# Altium PCB ИУ4.11.03.03.20.63.13.PcbDoc
Units mm, origin at the board's own origin, x right, y up, seen from the top; angles counter-clockwise.
Board outline 30 x 50 mm, 2 copper layers (Top Layer, Bottom Layer); 31 components, 22 nets, 135 pads, 19 vias.
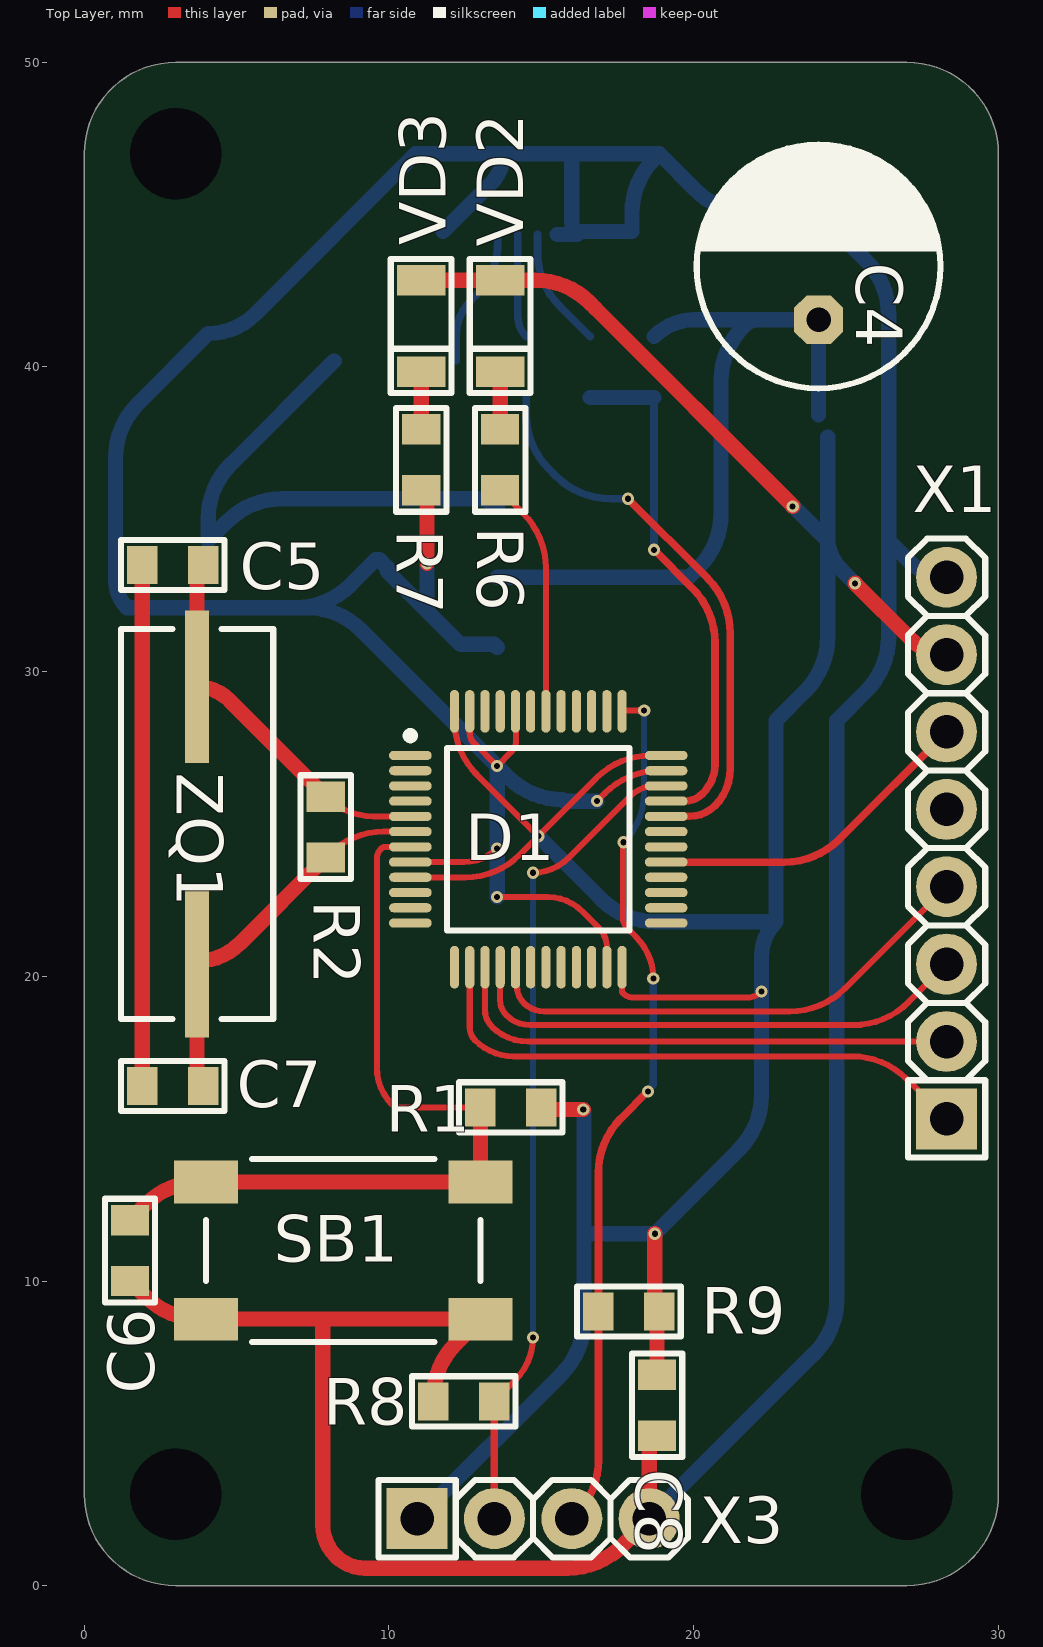
[diagram p0: Top Layer view]
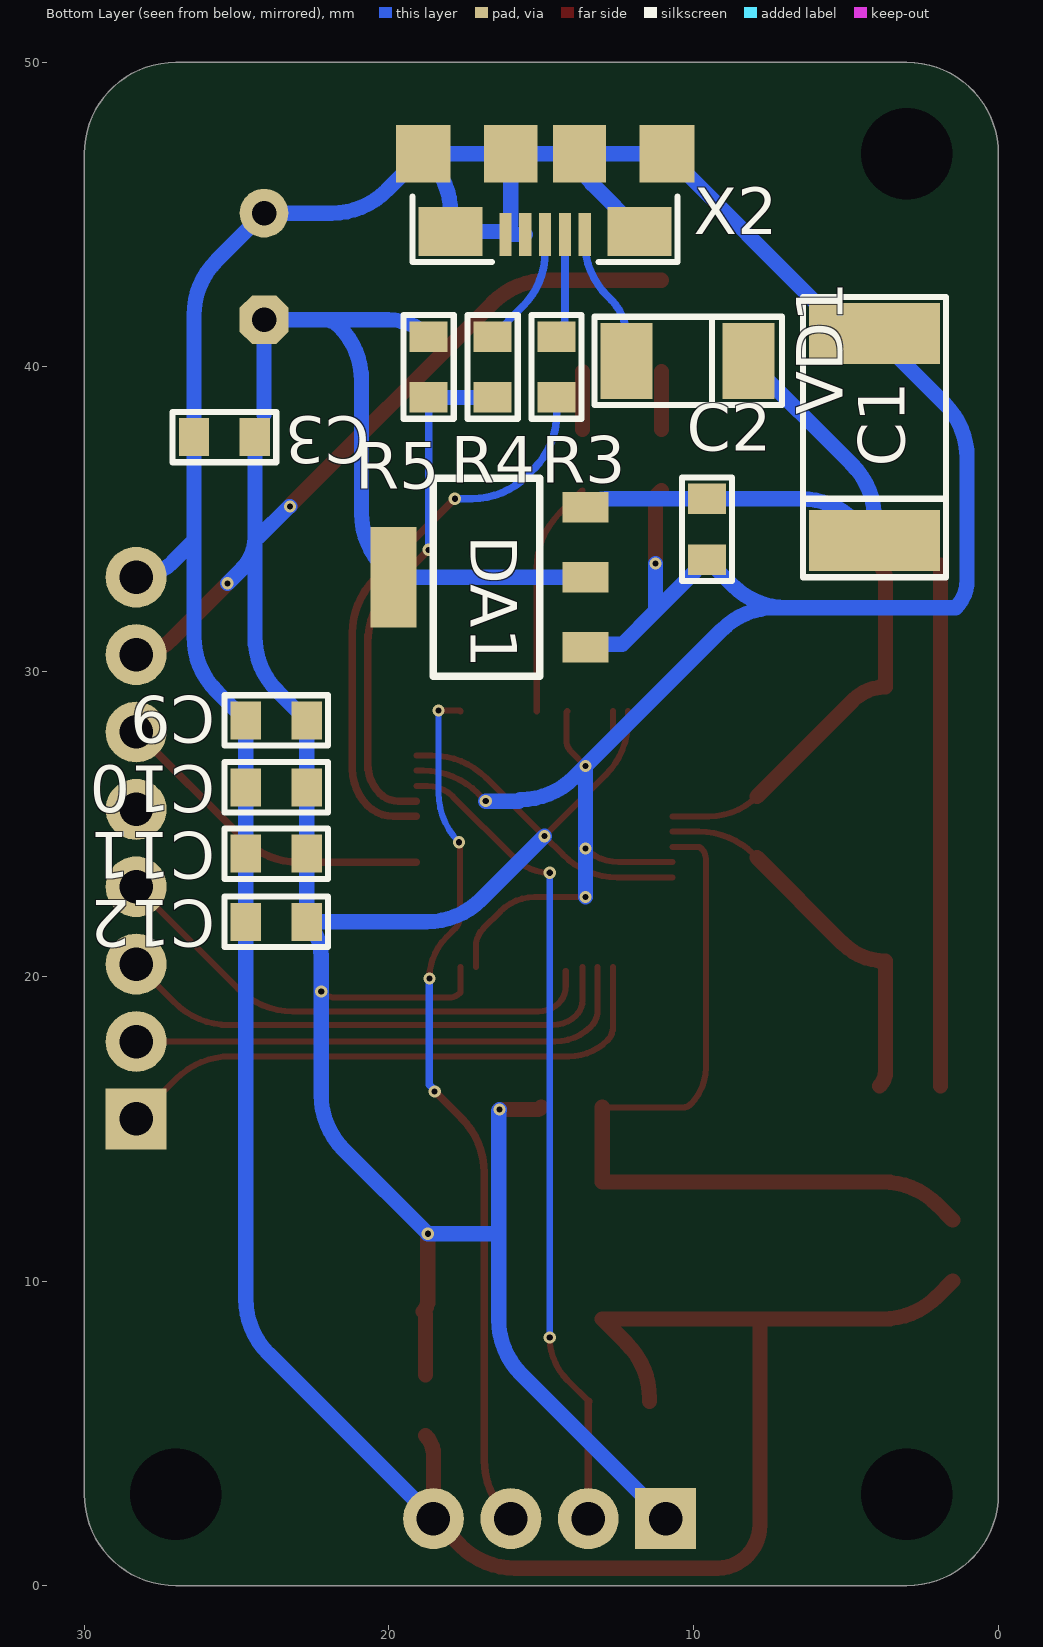
[diagram p1: Bottom Layer view, seen from below]
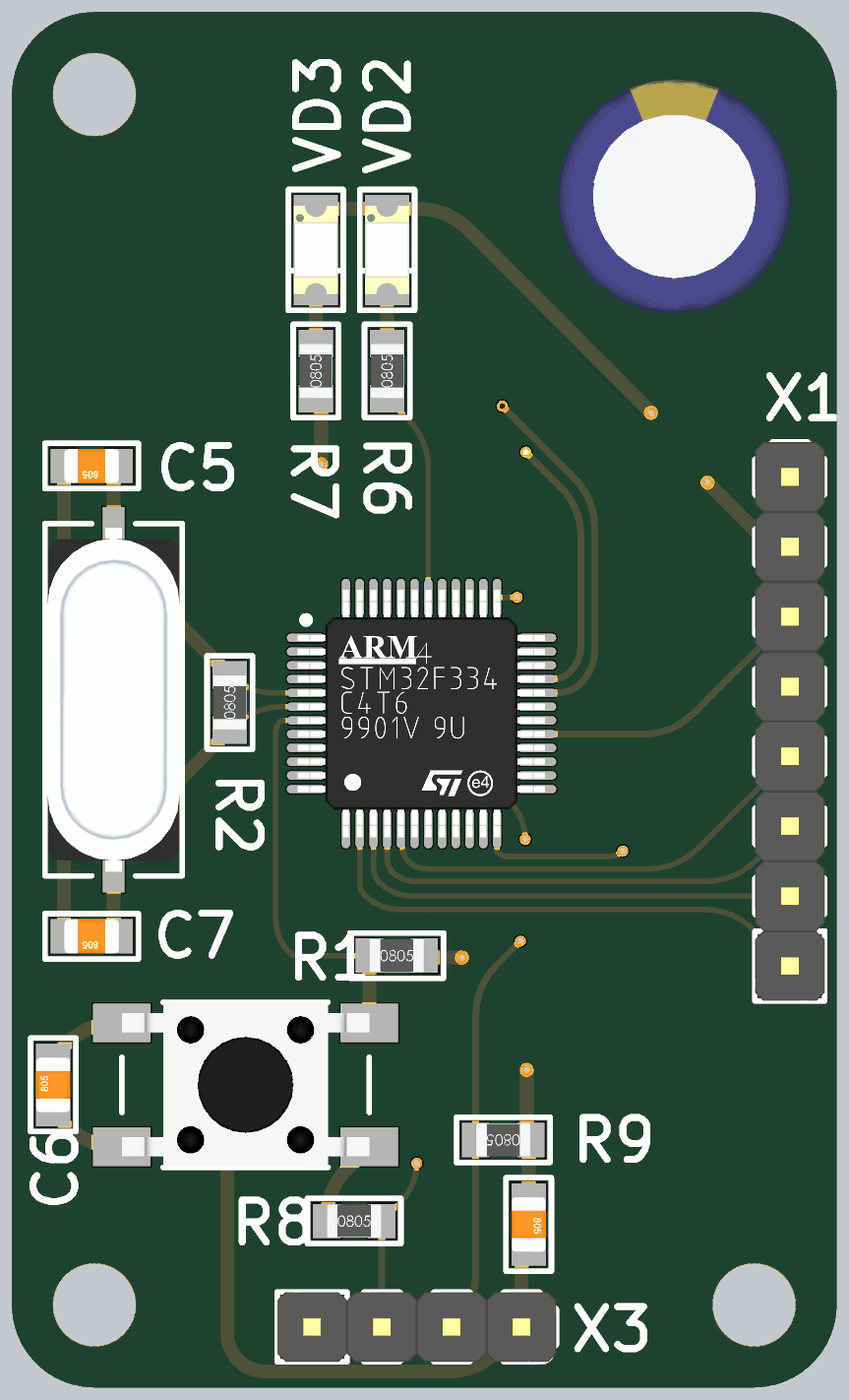
[diagram p2: 3D render of the assembled board from above, using the file's embedded part models]
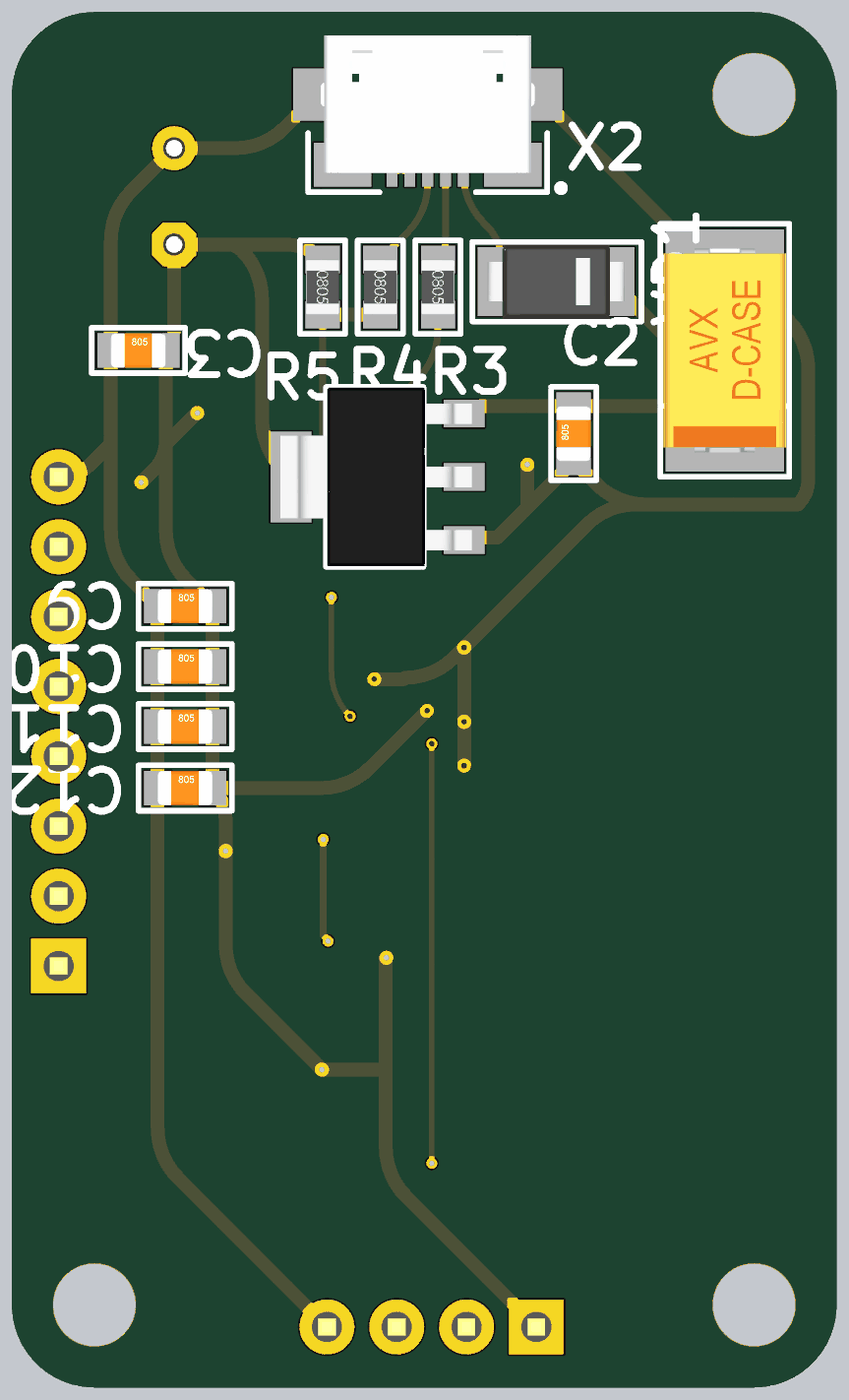
[diagram p3: 3D render of the assembled board from below, using the file's embedded part models]

## Layer stack, top to bottom
Top Solder: solder mask 0.0102, Solder Resist, Dk 3.5
Top Layer: signal copper 0.0356
Dielectric 1: dielectric 0.32, FR-4, Dk 4.8
Bottom Layer: signal copper 0.0356
Bottom Solder: solder mask 0.0102, Solder Resist, Dk 3.5

## Board outline
3,0 cw(c3,3) 0,3 0,47 cw(c3,47) 3,50 27,50 cw(c27,47) 30,47 30,3 cw(c27,3) 27,0

## Design rules (kind name [scope] priority, off if disabled: settings)
Clearance [All] p1: gap=0.1 ignorepadtopadclearanceinfootprint=FALSE
DiffPairsRouting [All] p1: maxlimit=0.3 minlimit=0.2 mostfreqgap=0.25 toplayer_minwidth=0.2 toplayer_maxwidth=0.4 toplayer_prefwidth=0.3 bottomlayer_minwidth=0.2 bottomlayer_maxwidth=0.4 bottomlayer_prefwidth=0.3 maxuncoupledlength=12.7
PolygonConnect [All] p1: connectstyle=Relief reliefconductorwidth=0.254 reliefentries=4 polygonreliefangle="90 Angle" airgapwidth=0.254
RoutingCorners [All] p1: cornerstyle=Round minsetback=0.5 maxsetback=0.3
RoutingVias [All] p1: holewidth=0.2 width=0.4 viastyle="Through Hole" minholewidth=0.2 minwidth=0.4 maxholewidth=1 maxwidth=1
SolderMaskExpansion [All] p1: expansion=0.06 istentingtop=FALSE
Width [All] p1: maxlimit=0.5 minlimit=0.2 preferedwidth=0.25 minimp=50.000000 maximp=50.000000 favimp=50.000000
28 further rules are at their usual default settings.

## Components (designator, comment, footprint, x,y, rotation, side; value= is the part's Value field where it differs from the comment)
C1 "Tantalum capacitor, 100 мкФ, 16 В, ±20%, 900mOhm, case D (7343), -55...+125°C" "CAP: TANTAL-D" 4.065,37.7 r90 bottom value="100 мкФ"
C2 "Ceramic capacitor, 100 нФ, X7R, ±10%, 50 В, 0805, -55...+125°C" "CAP: 0805" 9.564,34.675 r90 bottom value="100 нФ"
C3 "Ceramic capacitor, 100 нФ, X7R, ±10%, 50 В, 0805, -55...+125°C" "CAP: 0805" 25.4,37.7 r180 bottom value="100 нФ"
C4 "Aluminium capacitor, 330 мкФ, 16 В, ±20%, 54mOhm, 14x10x5 mm, -55...+105°C" "CAP: D8C3.5H12" 24.1,43.3 r90 top value="330 мкФ"
C5 "Ceramic capacitor, 20 пФ, X7R, ±10%, 50 В, 0805, -55...+125°C" "CAP: 0805" 2.9,33.5 r180 top value="20 пФ"
C6 "Ceramic capacitor, 1 мкФ, X7R, ±10%, 50 В, 0805, -55...+125°C" "CAP: 0805" 1.5,11 r90 top value="1 мкФ"
C7 "Ceramic capacitor, 20 пФ, X7R, ±10%, 50 В, 0805, -55...+125°C" "CAP: 0805" 2.9,16.4 r180 top value="20 пФ"
C8 "Ceramic capacitor, 100 нФ, X7R, ±10%, 50 В, 0805, -55...+125°C" "CAP: 0805" 18.8,5.925 r270 top value="100 нФ"
C9 "Ceramic capacitor, 100 нФ, X7R, ±10%, 50 В, 0805, -55...+125°C" "CAP: 0805" 23.7,28.4 r180 bottom value="100 нФ"
C10 "Ceramic capacitor, 100 нФ, X7R, ±10%, 50 В, 0805, -55...+125°C" "CAP: 0805" 23.7,26.205 r180 bottom value="100 нФ"
C11 "Ceramic capacitor, 100 нФ, X7R, ±10%, 50 В, 0805, -55...+125°C" "CAP: 0805" 23.7,24.025 r180 bottom value="100 нФ"
C12 "Ceramic capacitor, 100 нФ, X7R, ±10%, 50 В, 0805, -55...+125°C" "CAP: 0805" 23.7,21.789 r180 bottom value="100 нФ"
D1 "IC microcontroller, 32-Bit, Cortex-M3, 72MHz, 64KB, 20KB, 2...3.6V, -40...+85°C, 48-LQFP" 48-LQFP 14.9,24.5 r0 top
DA1 "LM1117-Series" SOT-223 16.8,33.1 r90 bottom value=LM1117MPX-3.3
R1 "Resistor film, 10 кОм, ±1%, 0805, 0.125W, -55...+125°C" "RES: 0805" 14,15.7 r0 top value="10 кОм"
R2 "Resistor film, 1 МОм, ±1%, 0805, 0.125W, -55...+125°C" "RES: 0805" 7.925,24.9 r90 top value="1 МОм"
R3 "Resistor film, 20 Ом, ±1%, 0805, 0.125W, -55...+125°C" "RES: 0805" 14.5,40 r270 bottom value="20 Ом"
R4 "Resistor film, 20 Ом, ±1%, 0805, 0.125W, -55...+125°C" "RES: 0805" 16.6,40 r270 bottom value="20 Ом"
R5 "Resistor film, 10 кОм, ±1%, 0805, 0.125W, -55...+125°C" "RES: 0805" 18.7,40 r270 bottom value="10 кОм"
R6 "Resistor film, 510 Ом, ±1%, 0805, 0.125W, -55...+125°C" "RES: 0805" 13.65,36.95 r90 top value="510 Ом"
R7 "Resistor film, 510 Ом, ±1%, 0805, 0.125W, -55...+125°C" "RES: 0805" 11.057,36.95 r90 top value="510 Ом"
R8 "Resistor film, 10 кОм, ±1%, 0805, 0.125W, -55...+125°C" "RES: 0805" 12.45,6.05 r0 top value="10 кОм"
R9 "Resistor film, 10 кОм, ±1%, 0805, 0.125W, -55...+125°C" "RES: 0805" 17.875,9 r180 top value="10 кОм"
SB1 "Tactile button, 6x6mm" "BUT: 6x6 SMD" 8.5,11 r180 top
VD1 "Schottky diode, 80V, 500mA, 1V, 15pF, SOD-123, -55...+150°C" "DIODE: SMA" 10.2,40.2 r180 bottom
VD2 "LED, Green, *, *, *, -55...+150°C" "LED: 1206R" 13.65,41.35 r270 top
VD3 "LED, Green, *, *, *, -55...+150°C" "LED: 1206R" 11.057,41.35 r270 top
X1 "Connector, 8pin, 2.54mm, 500VAC, 3A" "CON: PLS-8" 28.3,24.21 r90 top
X2 "USB micro B" "CON: USB micro-A (ZX62-B-5PA)" 14.875,44.35 r0 bottom
X3 "Connector, 4pin, 2.54mm, 500VAC, 3A" "CON: PLS-4" 14.73,2.2 r0 top
ZQ1 "Crystal" HC-49SM 3.7,25 r90 top value=HC49S-8.000MHZ-20pF

## Footprints (in the part's own frame and the unit in brackets; to place one, negate y for a bottom-side part, rotate by r counter-clockwise, add the part's x,y. Pads: shape width x height; smd on the part's side, far side on the other; paste and mask are expansions set on the pad)
48-LQFP [mm] "QFP, 48-Leads, Body 7x7mm, Pitch 0.5mm, IPC Medium Density"
  oval 1.4x0.3 smd: 1(-4.2,2.75) 2(-4.2,2.25) 3(-4.2,1.75) 4(-4.2,1.25) 5(-4.2,0.75) 6(-4.2,0.25) 7(-4.2,-0.25) 8(-4.2,-0.75) 9(-4.2,-1.25) 10(-4.2,-1.75) 11(-4.2,-2.25) 12(-4.2,-2.75) 25(4.2,-2.75) 26(4.2,-2.25) 27(4.2,-1.75) 28(4.2,-1.25) 29(4.2,-0.75) 30(4.2,-0.25) 31(4.2,0.25) 32(4.2,0.75) 33(4.2,1.25) 34(4.2,1.75) 35(4.2,2.25) 36(4.2,2.75)
  oval 0.3x1.4 smd: 13(-2.75,-4.2) 14(-2.25,-4.2) 15(-1.75,-4.2) 16(-1.25,-4.2) 17(-0.75,-4.2) 18(-0.25,-4.2) 19(0.25,-4.2) 20(0.75,-4.2) 21(1.25,-4.2) 22(1.75,-4.2) 23(2.25,-4.2) 24(2.75,-4.2) 37(2.75,4.2) 38(2.25,4.2) 39(1.75,4.2) 40(1.25,4.2) 41(0.75,4.2) 42(0.25,4.2) 43(-0.25,4.2) 44(-0.75,4.2) 45(-1.25,4.2) 46(-1.75,4.2) 47(-2.25,4.2) 48(-2.75,4.2)
  round 0.5 on Mech1: ""(-4,4)
  silkscreen extent -4.32,-3 3,3.52, body extent -4.5,-4.5 4.5,4.5, height 1.6
"BUT: 6x6 SMD" [mm] "Leaded Tactile Button 6x6"
  rect 2.1x1.4 smd: 1(-4.5,2.25) 1(4.5,2.25) 2(-4.5,-2.25) 2(4.5,-2.25)
  silkscreen extent -4.5,-3 4.5,3, body extent -4.5,-3 4.5,3, height 4.3
"CAP: 0805" [mm]
  rect 1x1.25 smd: 1(-1,0) 2(1,0)
  silkscreen extent -1.7,-0.83 1.7,0.82, body extent -1,-0.62 1,0.63, height 0.78
"CAP: D8C3.5H12" [mm]
  oct 1.6x1.6 hole 0.8: 1(-1.75,0)
  round 1.6 hole 0.8: 2(1.75,0)
  silkscreen extent -4,-4 4,4, body extent -4.25,-4.25 4.25,4.25, height 13
"CAP: TANTAL-D" [mm]
  rect 2x4.3 smd: 1(-3.4,0) 2(3.4,0)
  silkscreen extent -4.6,-2.35 4.6,2.35, body extent -3.7,-2.22 3.7,2.23, height 3.01
"CON: PLS-4" [mm] "PLS-40 4 pin header"
  rect 2x2 hole 1.1: 1(-3.81,0)
  round 2 hole 1.1: 2(-1.27,0) 3(1.27,0) 4(3.81,0)
  silkscreen extent -5.08,-1.27 5.08,1.27, body extent -5.08,-1.27 5.08,1.27, height 8.54
"CON: PLS-8" [mm] "PLS-40 8 pin header"
  rect 2x2 hole 1.1: 1(-8.89,0)
  round 2 hole 1.1: 2(-6.35,0) 3(-3.81,0) 4(-1.27,0) 5(1.27,0) 6(3.81,0) 7(6.35,0) 8(8.89,0)
  silkscreen extent -10.16,-1.27 10.16,1.27, body extent -10.16,-1.27 10.16,1.27, height 8.54
"CON: USB micro-A (ZX62-B-5PA)" [mm]
  rect 1.8x1.9 smd: 0(-4,-2.65) 0(4,-2.65)
  rect 2.1x1.6 smd: 0(-3.1,-0.1) 0(3.1,-0.1)
  rect 1.75x1.9 smd: 0(-1.125,-2.65) 0(1.125,-2.65)
  rect 0.4x1.4 smd: 1(-1.3,0) 2(-0.65,0) 3(0,0) 4(0.65,0) 5(1.3,0)
  round 0.5 on Bottom Overlay: ""(-4.85,0.75)
  silkscreen extent -4.35,-1.25 4.35,0.9, body extent -3.9,-4.8 3.9,0.2, height 2.68
"DIODE: SMA" [mm]
  rect 1.7x2.5 smd: 1(-2,0) 2(2,0)
  round 0.5 on Mech1: ""(2,0.9)
  silkscreen extent -3.05,-1.45 3.1,1.45, body extent -2.5,-1.35 2.5,1.35, height 2.28
HC-49SM [mm] "HC49 Surface Mount Footprint"
  rect 5x0.8 smd: 1(-4.5,0) 3(4.5,0)
  silkscreen extent -6.4,-2.5 6.4,2.5, body extent -6.25,-2.4 6.25,2.4, height 4.02
"LED: 1206R" [mm]
  rect 1x1.6 smd: 1(-1.5,0) 2(1.5,0)
  silkscreen extent -2.2,-1 2.2,1, body extent -1.6,-0.8 1.6,0.8, height 1.1
"RES: 0805" [mm]
  rect 1x1.25 smd: 1(-1,0) 2(1,0)
  silkscreen extent -1.7,-0.82 1.7,0.83, body extent -1,-0.6 1,0.6, height 0.44
SOT-223 [mm]
  rect 1x1.5 smd: 1(-2.3,-3.25) 2(0,-3.25) 3(2.3,-3.25)
  rect 3.3x1.5 smd: 2(0,3.05)
  silkscreen extent -3.25,-1.75 3.25,1.75, body extent -3.25,-3.53 3.25,3.43, height 1.65

## Part data
C1: library part Tantal_D, Manufacturer=AVX, Package="case D (7343)", PartNumber=TAJD476M035RNJV, Temperature=-55...+125°C, Tolerance=±20%, TypeCapacitor="Tantalum capacitor", TypeDielectric=X7R, Voltage="16 В", HelpURL=https://www.digikey.com/product-detail/en/avx-corporation/TAJD476M035RNJV/478-12122-1-ND/8605695, Impedance=900mOhm, ValueManufacturerPartNumber="Tantalum capacitor, 100 мкФ, 16 В, ±20%, 900mOhm, case D (7343), -55...+125°C"
C2 C3 C5 C6 C7 C8 C9 C10 C11 C12: library part Ceramic_0805, Manufacturer=Yageo, Package=0805, PartNumber=CC0805KRX7R7BB104, Temperature=-55...+125°C, Tolerance=±10%, TypeCapacitor="Ceramic capacitor", TypeDielectric=X7R, Voltage="50 В", HelpURL=https://www.digikey.com/product-detail/en/yageo/CC0805KRX7R7BB104/311-1142-1-ND/303052
  C2 C3 C8 C9 C10 C11 C12: ValueManufacturerPartNumber="Ceramic capacitor, 100 нФ, X7R, ±10%, 50 В, 0805, -55...+125°C"
  C5 C7: ValueManufacturerPartNumber="Ceramic capacitor, 20 пФ, X7R, ±10%, 50 В, 0805, -55...+125°C"
  C6: ValueManufacturerPartNumber="Ceramic capacitor, 1 мкФ, X7R, ±10%, 50 В, 0805, -55...+125°C"
C4: library part Aluminium, Manufacturer=Wurth, Package="14x10x5 mm", PartNumber=860080475013, Temperature=-55...+105°C, Tolerance=±20%, TypeCapacitor="Aluminium capacitor", Voltage="16 В", HelpURL=https://www.digikey.com/product-detail/en/wurth-electronics-inc/860080475013/732-9029-1-ND/5728972, Impedance=54mOhm, ValueManufacturerPartNumber="Aluminium capacitor, 330 мкФ, 16 В, ±20%, 54mOhm, 14x10x5 mm, -55...+105°C"
D1: library part STM32F103C8T6, "Cortex-M3", Manufacturer=STMicroelectronics, Package=48-LQFP, Temperature=-40...+85°C, ComponentType="IC microcontroller", CoreProcessor=Cortex-M3, CoreSize=32-Bit, HelpURL=https://www.digikey.com/product-detail/en/stmicroelectronics/STM32F103C8T6TR/497-17666-1-ND/7804402, MemoryRAM=20KB, MemoryROM=64KB, PartNumber=STM32F103C8T6, Speed=72MHz, Supply=2...3.6V, ValueManufacturerPartNumber="IC microcontroller, 32-Bit, Cortex-M3, 72MHz, 64KB, 20KB, 2...3.6V, -40...+85°C, 48-LQFP"
DA1: library part LM1117MPX-3.3, Input Voltage=+8.5…20V, Output Current=800mA, Output Voltage=+3.3V, ID=9, Part Number=LM1117MPX-3.3, Published=13.08.2015, Publisher="Andrew Danich", Type=Микросхема
R1 R2 R3 R4 R5 R6 R7 R8 R9: library part Resistor_0805, Manufacturer=Yageo, Package=0805, PartNumber=RC0805JR-07100RL, Power=0.125W, Temperature=-55...+125°C, Tolerance=±1%, TypeResistor="Resistor film", HelpURL=https://www.digikey.com/product-detail/en/yageo/RC0805JR-07100RL/311-100ARCT-ND/731185
  R1 R5 R8 R9: ValueManufacturerPartNumber="Resistor film, 10 кОм, ±1%, 0805, 0.125W, -55...+125°C"
  R2: ValueManufacturerPartNumber="Resistor film, 1 МОм, ±1%, 0805, 0.125W, -55...+125°C"
  R3 R4: ValueManufacturerPartNumber="Resistor film, 20 Ом, ±1%, 0805, 0.125W, -55...+125°C"
  R6 R7: ValueManufacturerPartNumber="Resistor film, 510 Ом, ±1%, 0805, 0.125W, -55...+125°C"
SB1: library part Button_tactile, Manufacturer="TE Connectivity", Package=6x6mm, PartNumber=FSM2JSMAATR, CommentText="\"Кнопка\"", HelpURL=https://www.digikey.com/product-detail/en/te-connectivity-alcoswitch-switches/FSM2JSMAATR/450-1792-1-ND/3503931, TypeButton="Tactile button", ValueManufacturerPartNumber="Tactile button, 6x6mm"
VD1: library part Schottky_single, Current=500mA, Manufacturer="Diodes Incorporated", Package=SOD-123, PartNumber=VS-10MQ100-M3/5AT, Temperature=-55...+150°C, Voltage=80V, VoltageDrop=1V, HelpURL=https://www.digikey.com/product-detail/en/diodes-incorporated/MBR0580S1-7/MBR0580S1-7DICT-ND/5080371, RecoveryTime=15pF, TypeDiode="Schottky diode", ValueManufacturerPartNumber="Schottky diode, 80V, 500mA, 1V, 15pF, SOD-123, -55...+150°C"
VD2 VD3: library part LED_single, Color=GREEN, ColorParameter=Green, Temperature=-55...+150°C, TypeDiode=LED, ValueManufacturerPartNumber="LED, Green, *, *, *, -55...+150°C"
X1: library part PLS-8, CurrentMax=3A, Manufacturer=Connfly, VoltageMax=500VAC, CommentText="\"RC522\"", HelpURL=https://www.chipdip.ru/product/pls-8-ds1021-1-8sf112, Multichannel=8pin, PartNumber=PLS-8, Pitch=2.54mm, TypeConnector=Connector, ValueManufacturerPartNumber="Connector, 8pin, 2.54mm, 500VAC, 3A"
X2: library part Connector_USB_micro_B, Manufacturer="Hirose Electric", PartNumber=ZX62-B-5PA, CommentText="\"USB\"", HelpURL=https://www.digikey.com/product-detail/en/hirose-electric-co-ltd/ZX62-B-5PA/H11579CT-ND/1851090, TypeConnector="USB micro B", ValueManufacturerPartNumber="USB micro B"
X3: library part PLS-4, CurrentMax=3A, Manufacturer=Connfly, VoltageMax=500VAC, CommentText="\"SWD\"", HelpURL=https://www.chipdip.ru/product/pls-4, Multichannel=4pin, PartNumber=PLS-4, Pitch=2.54mm, TypeConnector=Connector, ValueManufacturerPartNumber="Connector, 4pin, 2.54mm, 500VAC, 3A"
ZQ1: library part HC49SM-8.000MHz-20pF, Load Capacitance=20pF, Output Frequency=8MHz, Temperature Coefficient=±50ppm, Application Category=1, ID=17, Part Number=HC49SM-8.000MHz-20pF, Published=08.03.2013, Publisher="Andrew Danich", Type=Резонатор

## Free pads (board coordinates)
  round 0 hole 3: 2(3,3) 2(3,47) 2(27,3)

## Via types
v1: diameter 0.4, hole 0.2, Top Layer to Bottom Layer, 19 vias

## Nets (pads, with @x,y where several pads share a name; then routed paths per layer and width w, separated by ;. In a path a pad name is that pad's centre, name@x,y a point inside that pad or via, vN(x,y) a via of type N, cw(c..) or ccw(c..) an arc to the next point about the centre after c; other vN are vias at no path point)
+3.3: C3.2 C4.1 C8.1 C9.2 C10.2 C11.2 C12.2 D1.9 D1.24 D1.36 D1.48 DA1.2 R1.2 R5.1 R9.1 VD2.1 VD3.1 X1.7 X3.1 | length 210.4
  Top Layer w0.2: D1.9 12.508,23.25 ; D1.48 D1.48@12.15,28.392 ; D1.24 17.65,19.51 ccw(c17.735,19.51) 17.675,19.45 ccw(c18.037,19.812) 18.037,19.3 21.742,19.3 ccw(c21.742,19.983) v1(22.225,19.5) ; D1.36 D1.36@18.592,27.25 ; D1.48@12.15,28.392 ccw(c14.665,28.392) 12.887,26.613 ; D1.48@12.15,28.392 ccw(c14.665,28.392) 12.887,26.613 ; D1.48@12.15,28.392 ccw(c14.665,28.392) 12.887,26.613 ; D1.48@12.15,28.392 ccw(c14.665,28.392) 12.887,26.613 ; 12.508,23.25 ccw(c12.508,25.765) 14.286,23.987 ; 12.508,23.25 ccw(c12.508,25.765) 14.286,23.987 ; 12.508,23.25 ccw(c12.508,25.765) 14.286,23.987 ; 12.508,23.25 ccw(c12.508,25.765) 14.286,23.987 ; 12.887,26.613 v1(14.9,24.6) ; 14.286,23.986 v1(14.9,24.6) ; v1(14.9,24.6) 16.813,26.513 ; 16.813,26.513 cw(c18.592,24.735) D1.36@18.592,27.25 ; 16.813,26.513 cw(c18.592,24.735) D1.36@18.592,27.25 ; 16.813,26.513 cw(c18.592,24.735) D1.36@18.592,27.25 ; 16.813,26.513 cw(c18.592,24.735) D1.36@18.592,27.25
  Top Layer w0.5: VD3.1 VD2.1 14.798,42.85 cw(c14.798,40.31) 16.594,42.106 16.771,41.929 23.25,35.45 v1(23.25,35.425) ; R1.2 ccw(c15.181,15.881) 15.181,15.625 v1(16.375,15.625) ; v1(18.725,11.55) 18.725,9.362 ccw(c19.237,9.362) R9.1 ccw(c19.056,8.819) 18.8,8.819 C8.1 ; v1(25.3,32.9) 27.173,31.027 ccw(c28.3,32.153) X1.7
  Bottom Layer w0.5: X3.1 15.656,6.936 ccw(c13.86,8.732) 16.4,8.732 16.4,11.6 ; DA1.2@13.55,33.1 19.85,33.1 DA1.2@20.156,33.406 ; v1(14.9,24.6) 16.967,22.533 ccw(c18.763,24.329) 18.763,21.789 C12.2 ; v1(16.375,15.625) cw(c16.315,15.565) 16.4,15.565 16.4,11.6 ; v1(23.25,35.425) 23.275,35.425 24.3,34.4 24.4,34.4 ; 24.1,38.424 C4.1 20.028,41.55 ; C3.2 24.4,34.4 ; v1(25.3,32.9) 24.824,33.376 cw(c25.849,34.4) 24.4,34.4 ; 16.4,11.6 ccw(c16.521,11.721) 16.521,11.55 v1(18.725,11.55) 21.481,14.306 ccw(c19.685,16.102) 22.225,16.102 v1(22.225,19.5) 22.225,20.643 cw(c23.846,20.643) C12.2 ; R5.1 cw(c20.028,39.672) 20.028,41.55 ; R5.1 cw(c20.028,39.672) 20.028,41.55 ; R5.1 cw(c20.028,39.672) 20.028,41.55 ; R5.1 cw(c20.028,39.672) 20.028,41.55 ; R5.1 cw(c20.028,39.672) 20.028,41.55 ; R5.1 cw(c20.028,39.672) 20.028,41.55 ; R5.1 cw(c20.028,39.672) 20.028,41.55 ; R5.1 cw(c20.028,39.672) 20.028,41.55 ; R5.1 cw(c20.028,39.672) 20.028,41.55 ; R5.1 cw(c20.028,39.672) 20.028,41.55 ; R5.1 cw(c20.028,39.672) 20.028,41.55 ; R5.1 cw(c20.028,39.672) 20.028,41.55 ; R5.1 cw(c20.028,39.672) 20.028,41.55 ; R5.1 cw(c20.028,39.672) 20.028,41.55 ; R5.1 cw(c20.028,39.672) 20.028,41.55 ; R5.1 cw(c20.028,39.672) 20.028,41.55 ; DA1.2@20.156,33.406 ccw(c18.36,35.202) 20.9,35.202 ; DA1.2@20.156,33.406 ccw(c18.36,35.202) 20.9,35.202 ; DA1.2@20.156,33.406 ccw(c18.36,35.202) 20.9,35.202 ; 20.9,35.202 20.9,39.548 ; 20.9,39.548 cw(c23.44,39.548) 21.644,41.344 ; 20.9,39.548 cw(c23.44,39.548) 21.644,41.344 ; 20.9,39.548 cw(c23.44,39.548) 21.644,41.344 ; 20.9,39.548 cw(c23.44,39.548) 21.644,41.344 ; 20.9,39.548 cw(c23.44,39.548) 21.644,41.344 ; 20.9,39.548 cw(c23.44,39.548) 21.644,41.344 ; 20.9,39.548 cw(c23.44,39.548) 21.644,41.344 ; 20.9,39.548 cw(c23.44,39.548) 21.644,41.344 ; 20.9,39.548 cw(c23.44,39.548) 21.644,41.344 ; 20.9,39.548 cw(c23.44,39.548) 21.644,41.344 ; 20.9,39.548 cw(c23.44,39.548) 21.644,41.344 ; 20.9,39.548 cw(c23.44,39.548) 21.644,41.344 ; 20.9,39.548 cw(c23.44,39.548) 21.644,41.344 ; 20.9,39.548 cw(c23.44,39.548) 21.644,41.344 ; 20.9,39.548 cw(c23.44,39.548) 21.644,41.344 ; 20.9,39.548 cw(c23.44,39.548) 21.644,41.344 ; 21.644,41.344 cw(c22.141,40.847) 22.141,41.55 ; 21.644,41.344 cw(c22.141,40.847) 22.141,41.55 ; 21.644,41.344 cw(c22.141,40.847) 22.141,41.55 ; 21.644,41.344 cw(c22.141,40.847) 22.141,41.55 ; 21.644,41.344 cw(c22.141,40.847) 22.141,41.55 ; 21.644,41.344 cw(c22.141,40.847) 22.141,41.55 ; 21.644,41.344 cw(c22.141,40.847) 22.141,41.55 ; 21.644,41.344 cw(c22.141,40.847) 22.141,41.55 ; 21.644,41.344 cw(c22.141,40.847) 22.141,41.55 ; 21.644,41.344 cw(c22.141,40.847) 22.141,41.55 ; 21.644,41.344 cw(c22.141,40.847) 22.141,41.55 ; 21.644,41.344 cw(c22.141,40.847) 22.141,41.55 ; 21.644,41.344 cw(c22.141,40.847) 22.141,41.55 ; 21.644,41.344 cw(c22.141,40.847) 22.141,41.55 ; 21.644,41.344 cw(c22.141,40.847) 22.141,41.55 ; 21.644,41.344 cw(c22.141,40.847) 22.141,41.55 ; C12.2 C11.2 C10.2 C9.2 23.656,29.356 ccw(c21.86,31.152) 24.4,31.152 24.4,34.4
+5: C1.1 C2.2 DA1.3 VD1.2 | length 47.4
  Bottom Layer w0.5: VD1.2 4.809,36.809 ; DA1.3 ccw(c12.886,34.736) 12.886,35.675 C2.2 6.481,35.675 ccw(c6.481,33.16) 4.703,34.938 C1.1 C1.1@4.065,35.012 ; C1.1@4.065,35.013 cw(c6.605,35.013) 4.809,36.809 ; C1.1@4.065,35.013 cw(c6.605,35.013) 4.809,36.809 ; C1.1@4.065,35.013 cw(c6.605,35.013) 4.809,36.809 ; C1.1@4.065,35.013 cw(c6.605,35.013) 4.809,36.809 ; C1.1@4.065,35.013 cw(c6.605,35.013) 4.809,36.809 ; C1.1@4.065,35.013 cw(c6.605,35.013) 4.809,36.809 ; C1.1@4.065,35.013 cw(c6.605,35.013) 4.809,36.809 ; C1.1@4.065,35.013 cw(c6.605,35.013) 4.809,36.809 ; C1.1@4.065,35.013 cw(c6.605,35.013) 4.809,36.809 ; C1.1@4.065,35.013 cw(c6.605,35.013) 4.809,36.809 ; C1.1@4.065,35.013 cw(c6.605,35.013) 4.809,36.809 ; C1.1@4.065,35.013 cw(c6.605,35.013) 4.809,36.809 ; C1.1@4.065,35.013 cw(c6.605,35.013) 4.809,36.809 ; C1.1@4.065,35.013 cw(c6.605,35.013) 4.809,36.809 ; C1.1@4.065,35.013 cw(c6.605,35.013) 4.809,36.809 ; C1.1@4.065,35.013 cw(c6.605,35.013) 4.809,36.809
GND: C1.2 C2.1 C3.1 C4.2 C6.1 C8.2 C9.1 C10.1 C11.1 C12.1 D1.8 D1.23 D1.35 D1.44 D1.47 DA1.1 R7.1 R8.1 SB1.1 X1.8 X2.0 X2.4 X2.5 X3.4 | length 181.6
  Top Layer w0.2: D1.8 12.464,23.75 ccw(c12.464,25.286) v1(13.55,24.2) ; D1.47 12.65,27.975 ccw(c13.073,27.975) 12.774,27.676 v1(13.55,26.9) 14.016,27.366 ccw(c13.632,27.75) 14.175,27.75 14.175,28.64 ccw(c14.09,28.64) D1.44 ; v1(13.55,22.6) 15.223,22.6 cw(c15.223,21.026) 16.336,22.139 16.9,21.575 cw(c16.296,20.971) 17.15,20.971 D1.23 ; v1(16.825,25.75) 17.081,26.006 cw(c18.877,24.21) 18.877,26.75 D1.35
  Top Layer w0.5: C6.1 2.006,9.494 ccw(c3.802,11.29) 3.802,8.75 4,8.75 7.825,8.75 ; R7.1 11.25,35.757 v1(11.25,33.55) ; R8.1 11.45,6.148 cw(c13.99,6.148) 12.194,7.944 13,8.75 7.825,8.75 ; C8.2 ccw(c19.428,4.297) 18.54,4.297 X3.4 17.659,1.319 cw(c15.863,3.115) 15.863,0.575 9.216,0.575 cw(c9.216,1.941) 8.25,0.975 cw(c9.276,2.001) 7.825,2.001 7.825,8.75
  Bottom Layer w0.5: v1(11.25,33.55) 11.25,31.989 ; X2.0@11.775,44.45 13.343,46.018 ccw(c12.362,47) X2.0@13.75,47 ; v1@13.55,22.6 v1(13.55,24.2) v1(13.55,26.9) ; DA1.1 13.454,30.896 12.343,30.896 11.25,31.989 ; X2.4 X2.5 ; v1(16.825,25.75) 15.742,25.75 15.692,25.8 cw(c15.692,28.315) 13.913,26.537 v1(13.55,26.9) ; X3.4 23.956,7.616 ccw(c22.16,9.412) 24.7,9.412 C12.1 C11.1 C10.1 C9.1 25.656,29.356 ccw(c23.86,31.152) 26.4,31.152 26.4,34.3 ; X2.0@18.719,46.844 ccw(c20.515,45.048) 17.975,45.048 17.975,44.45 16.416,44.45 ccw(c16.416,44.108) X2.5 ; X1.8 cw(c28.3,34.79) 27.105,33.595 26.4,34.3 ; 6.947,32.1 ccw(c6.947,34.615) 8.725,32.836 C2.1 9.689,33.675 9.939,33.425 9.939,33.3 11.25,31.989 ; 6.947,32.1 1.4,32.1 cw(c2.305,33.005) 1.025,33.005 1.025,37.008 cw(c3.565,37.008) 1.769,38.804 C1.2 ccw(c4.065,43.298) 5.619,41.744 10.875,47 10.882,46.993 10.89,47 X2.0@13.75,47 ; 6.947,32.1 7.308,32.1 cw(c7.308,29.585) 9.086,31.363 v1(13.55,26.9) ; X2.0@13.75,47 X2.0@16,47 ; X2.0@16,47 18.875,47 20.081,45.794 ccw(c21.877,47.59) 21.877,45.05 C4.2 25.656,43.494 ; X2.0@16,47 16,44.772 ccw(c16.598,44.772) X2.5 ; 25.656,43.494 cw(c23.86,41.698) 26.4,41.698 ; 25.656,43.494 cw(c23.86,41.698) 26.4,41.698 ; 26.4,34.3 C3.1 26.4,41.698
NetC5_1: C5.1 D1.5 R2.2 ZQ1.3 | length 12.7
  Top Layer w0.2: R2.2 ccw(c9.494,27.469) 9.494,25.25 D1.5
  Top Layer w0.5: C5.1 ccw(c4.383,33.017) 3.7,33.017 ZQ1.3 cw(c3.7,27.991) 4.767,29.058 R2.2
NetC5_2: C5.2 C7.2 | length 17.1
  Top Layer w0.5: C7.2 C5.2
NetC6_2: C6.2 D1.7 R1.1 SB1.2 | length 26.8
  Top Layer w0.2: D1.7 9.871,24.25 ccw(c9.871,24.079) 9.75,24.2 9.735,24.185 ccw(c10.06,23.859) 9.6,23.859 9.6,17.007 ccw(c11.307,17.007) 10.1,15.8 ccw(c10.341,16.041) 10.341,15.7 R1.1
  Top Layer w0.5: C6.2 2.006,12.506 cw(c3.802,10.71) 3.802,13.25 4,13.25 13,13.25 R1.1
NetC7_1: C7.1 D1.6 R2.1 ZQ1.1 | length 12.7
  Top Layer w0.2: R2.1 8.031,24.006 cw(c9.827,22.21) 9.827,24.75 D1.6
  Top Layer w0.5: C7.1 cw(c4.383,16.883) 3.7,16.883 ZQ1.1 ccw(c3.7,22.492) 5.108,21.083 R2.1
NetD1_14: D1.14 X1.1 | length 18.8
  Top Layer w0.2: D1.14 12.65,18.322 ccw(c13.247,18.322) 12.825,17.9 ccw(c14.092,19.167) 14.092,17.375 25.193,17.375 cw(c25.193,14.835) 26.989,16.631 X1.1
NetD1_15: D1.15 X1.2 | length 17.1
  Top Layer w0.2: D1.15 13.15,18.893 ccw(c13.918,18.893) 13.375,18.35 ccw(c14.558,19.533) 14.558,17.86 X1.2
NetD1_16: D1.16 X1.3 | length 16.9
  Top Layer w0.2: D1.16 13.65,19.208 ccw(c14.333,19.208) 13.85,18.725 ccw(c14.635,19.51) 14.635,18.4 25.248,18.4 ccw(c25.248,20.94) 27.044,19.144 X1.3
NetD1_17: D1.17 X1.4 | length 16.6
  Top Layer w0.2: D1.17@14.2,20.179 14.2,19.668 ccw(c14.968,19.668) 14.425,19.125 ccw(c15.089,19.789) 15.089,18.85 23.158,18.85 ccw(c23.158,21.39) 24.954,19.594 X1.4
NetD1_29: D1.29 X1.6 | length 10.9
  Top Layer w0.25: D1.29 22.978,23.75 ccw(c22.978,26.29) 24.774,24.494 X1.6
NetD1_32: D1.32 R3.2 | length 18.7
  Top Layer w0.25: v1(17.84,35.675) 20.456,33.058 cw(c18.66,31.262) 21.2,31.262 21.2,26.807 cw(c19.493,26.807) 20.7,25.6 cw(c19.855,26.445) 19.855,25.25 D1.32
  Bottom Layer w0.25: R3.2 14.5,38.452 ccw(c17.04,38.452) 15.244,36.656 15.481,36.419 ccw(c17.277,38.215) 17.277,35.675 v1(17.84,35.675) ccw(c17.84,35.76) v1@17.9,35.7
NetD1_33: D1.33 R4.2 R5.2 | length 17.2
  Top Layer w0.25: v1(18.7,34) 19.956,32.744 cw(c18.16,30.948) 20.7,30.948 20.7,26.966 cw(c19.334,26.966) 20.3,26 cw(c19.696,26.604) 19.696,25.75 D1.33
  Bottom Layer w0.25: v1(18.7,34) R5.2
  Bottom Layer w0.5: R4.2 R5.2
NetD1_34: D1.34 R8.2 X3.2 | length 27.1
  Top Layer w0.2: R8.2 14.142,6.742 ccw(c12.733,8.15) v1(14.725,8.15) ; v1(14.725,23.4) ccw(c14.725,25.03) 15.877,23.877 17.9,25.9 cw(c18.745,25.055) 18.745,26.25 D1.34
  Top Layer w0.25: R8.2 cw(c13.426,6.026) 13.46,6.026 X3.2
  Bottom Layer w0.2: v1(14.725,8.15) v1(14.725,23.4)
NetD1_37: D1.37 R9.2 X3.3 | length 28.6
  Top Layer w0.2: D1.37 cw(c17.71,28.64) 17.71,28.725 v1(18.375,28.725) ; v1(17.7,24.4) ccw(c17.76,24.34) 17.675,24.34 17.675,21.937 ccw(c18.187,21.937) 17.825,21.575 18.109,21.291 cw(c16.744,19.925) v1(18.675,19.925)
  Top Layer w0.25: X3.3 16.131,2.331 ccw(c14.335,4.127) 16.875,4.127 R9.2 16.875,13.548 cw(c19.415,13.548) 17.619,15.344 v1(18.5,16.225)
  Bottom Layer w0.2: v1(17.7,24.4) ccw(c16.07,26.03) 18.375,26.03 v1(18.375,28.725)
  Bottom Layer w0.25: v1(18.5,16.225) 18.5,16.266 18.675,16.441 v1(18.675,19.925)
NetD1_42: D1.42 R6.1 | length 7.8
  Top Layer w0.2: R6.1 14.406,35.194 cw(c12.61,33.398) 15.15,33.398 D1.42
NetR3_1: R3.1 X2.2 | length 3.4
  Bottom Layer w0.25: X2.2 14.225,41.664 ccw(c15.164,41.664) R3.1
NetR4_1: R4.1 X2.3 | length 4
  Bottom Layer w0.25: X2.3 14.875,43.767 ccw(c17.39,43.767) 15.612,41.988 R4.1
NetR6_2: R6.2 VD2.2 | length 1.9
  Top Layer w0.5: R6.2 VD2.2
NetR7_2: R7.2 VD3.2 | length 1.9
  Top Layer w0.5: R7.2 VD3.2
NetVD1_1: VD1.1 X2.1 | length 4.5
  Bottom Layer w0.25: VD1.1 12.2,40.993 cw(c13.907,40.993) 12.7,42.2 12.839,42.339 ccw(c11.06,44.117) 13.575,44.117 X2.1
pads on no net: D1. D1.1 D1.2 D1.3 D1.4 D1.10 D1.11 D1.12 D1.13 D1.18 D1.19 D1.20 D1.21 D1.22 D1.25 D1.26 D1.27 D1.28 D1.30 D1.31 D1.38 D1.39 D1.40 D1.41 D1.43 D1.45 D1.46 VD1. X1.5 X2.

## Silkscreen, mask and mechanical layers (free items; w line width, h text height)
Board:
  the board outline again, w0.254